# Altium PCB main_board.PcbDoc (part 2 of 2)
Units mm, origin at the board's own origin, x right, y up, seen from the top; angles counter-clockwise.
Board outline 50 x 49.98 mm, 2 copper layers (Top Layer, Bottom Layer), stack 1.071 mm thick; 96 components, 82 nets, 418 pads, 272 vias.
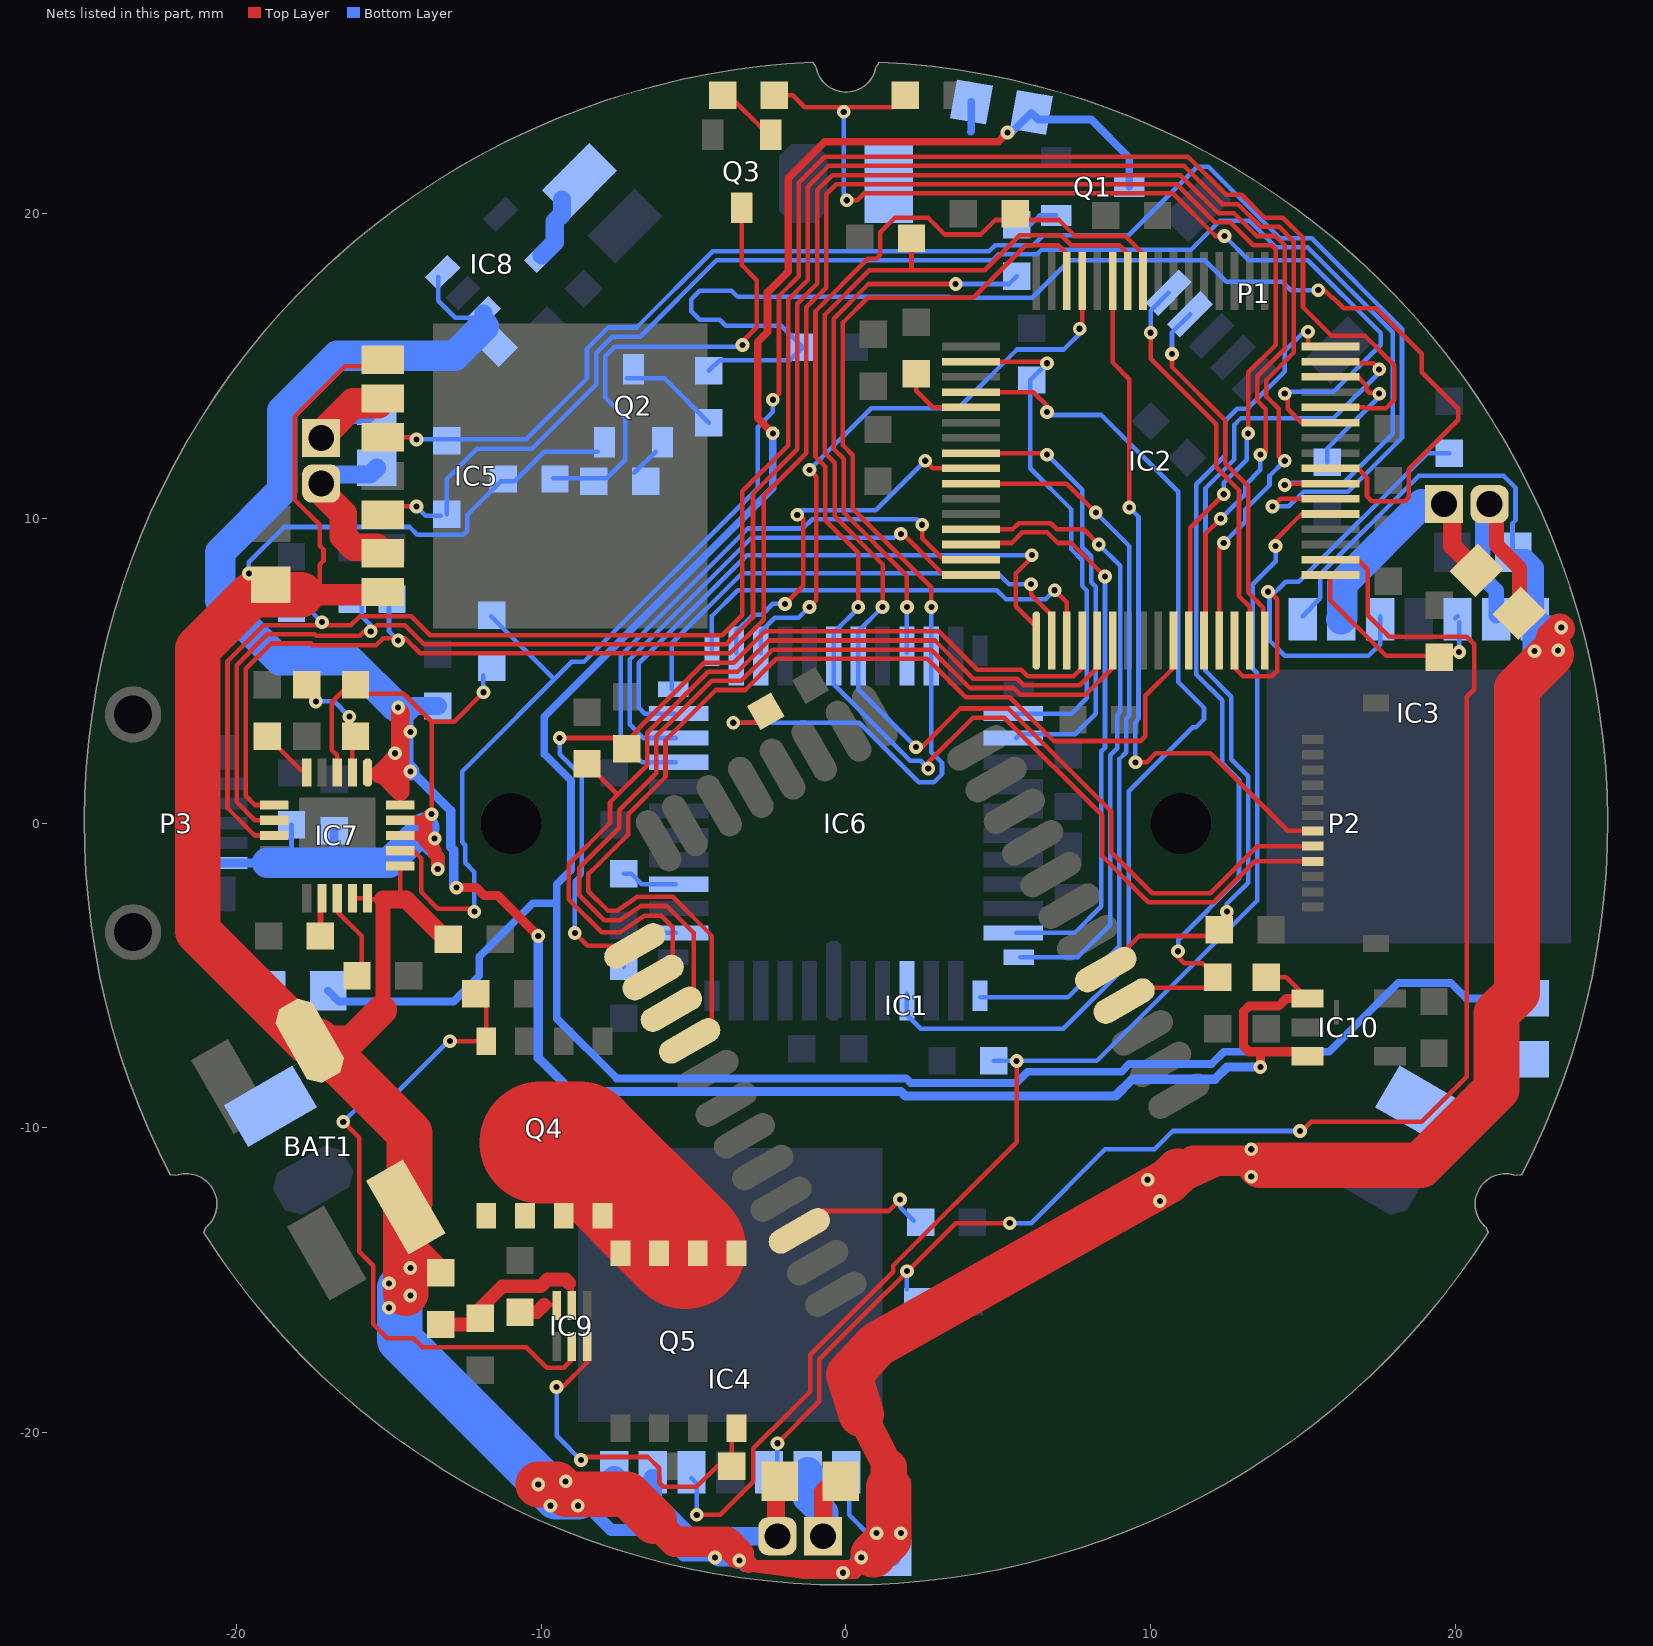
[diagram p2: the nets of this part, all layers, seen from the top]

## Via types
v1: diameter 0.45, hole 0.2, Top Layer to Bottom Layer, 271 vias
v2: diameter 0.45, hole 0.2, Top Layer to Bottom Layer, tented both sides, 1 vias

## Nets (pads, with @x,y where several pads share a name; then routed paths per layer and width w, separated by ;. In a path a pad name is that pad's centre, name@x,y a point inside that pad or via, vN(x,y) a via of type N, cw(c..) or ccw(c..) an arc to the next point about the centre after c; other vN are vias at no path point) (continued)
NetC12_2: C12.2 IC7.3 IC7.18 IC7.19 P3.1 R25.2 R26.2 R31.2 | length 27
  Top Layer w0.15: IC7.3@-16.7,1.665 -16.7,2.232 -16.875,2.407 -16.875,3.975 -16.2,4.65 -15.8,4.25 -14.514,4.25 -13.6,3.336 ; v1(-13.6,0.3) -13.6,3.336 ; v1(-11.9,4.3) -12.864,3.336 -13.6,3.336
  Top Layer w0.3: IC7.18@-14.635,-0.4 -14.1,-0.4 -14.05,-0.45 -13.8,-0.45 ; IC7.19@-14.635,0.1 -13.8,0.1
  Top Layer w0.45: v1(-13.6,0.3) -13.8,0.1 -13.8,-0.45 -13.8,-0.585 -13.495,-0.89 -13.495,-1.005 -13.4,-1.1 v1(-13.4,-1.5)
  Bottom Layer w0.15: -18.2,-1.3 R31.2@-18.2,-0.05 ; v1(-11.9,4.3) R25.2@-11.9,4.85
  Bottom Layer w0.3: P3.1@-20.55,-1.3 -18.9,-1.3 ; -16.8,-1.3 C12.2@-16.8,-0.25
  Bottom Layer w0.45: -13.85,-0.15 -13.85,-0.65 -13.4,-1.1 v1(-13.4,-1.5)
  Bottom Layer w1: -19,-1.3 -18.2,-1.3 -16.8,-1.3 -15,-1.3 -13.85,-0.15
  other v1: -13.5,-0.5
NetC14_2: C14.2 IC9.5 R35.1 | length 5.8
  Top Layer w0.15: -9.08,-15.1 -9,-15.18 IC9.5@-9,-15.825
  Top Layer w0.45: R35.1@-13.3,-16.45 -12.2,-16.45 C14.2@-12,-16.25 -12,-15.92 -11.28,-15.2 -10.02,-15.2 -9.795,-14.975 -9.205,-14.975 -9.08,-15.1
NetC18_1: C18.1 IC3.6 M1.2 | length 7.6
  Top Layer w0.5: M1.2@20.85,10.5 21.35,10 21.35,9.135 22.107,8.378 C18.1@22.107,6.893
  Bottom Layer w0.5: M1.2@20.9,10.05 20.9,8.084 21.34,7.644 IC3.6@21.34,6.8
NetC18_2: C18.2 IC3.2 M1.1 | length 8.5
  Top Layer w0.6: M1.1@19.35,10.5 19.7,10.5 19.9,10.3 19.9,9.1 C18.2@20.693,8.307
  Bottom Layer w1: IC3.2@16.26,6.7 16.295,6.735 16.295,7.87 18.9,10.475 M1.1@19.625,10.475
NetC19_1: C19.1 IC4.6 M2.2 | length 7.2
  Top Layer w0.6: C19.1@-2.3,-21.5 -2.3,-23.35 M2.2@-2.25,-23.4
  Bottom Layer w0.6: IC4.6@-6.34,-21.5 -6.34,-22.231 -5.171,-23.4 M2.2@-2.25,-23.4
NetC19_2: C19.2 IC4.2 M2.1 | length 4.5
  Top Layer w0.6: M2.1@-0.75,-23.4 -0.75,-21.95 C19.2@-0.3,-21.5
  Bottom Layer w0.6: IC4.2@-1.26,-21.5 IC4.2@-1.175,-21.585
  Bottom Layer w1: IC4.2@-1.26,-21.3 -1.26,-21.5 -1.26,-22.114 -0.75,-22.624 M2.1@-0.75,-23.4
NetC20_1: C20.1 IC5.6 M3.2 | length 5.6
  Top Layer w0.6: M3.2@-17.4,11.45 M3.2@-17,11.05
  Top Layer w0.9: M3.2@-17.225,10.885 -16.5,10.16 -16.5,9.416 -16.149,9.065 -15.405,9.065 IC5.6@-15.2,8.86
  Bottom Layer w0.6: M3.2@-17,11.45 -15.62,11.45 C20.1@-15.4,11.67
NetC20_2: C20.2 IC5.2 M3.1 | length 4.9
  Top Layer w0.5: M3.1@-17.225,12.65 -17.225,12.729 M3.1@-17.225,13.025
  Top Layer w1: M3.1@-17.225,12.729 -16.169,13.785 IC5.2@-15.355,13.785
  Bottom Layer w0.5: M3.1@-17.3,12.95 -16.9,13.35 -15.72,13.35 C20.2@-15.4,13.67
NetIC1_4: IC1.4 IC2.32 R4.1 | length 28.9
  Top Layer w0.15: IC1.4@9.127,-5.839 9.661,-5.839 10.1,-5.4 11.9,-5.4 11.9,-4.8 11.7,-4.6 11.1,-4.6 10.9,-4.4 v1(10.9,-4.2) ; IC2.32@15.175,15.725 v1@15.175,16.164
  Bottom Layer w0.15: v1(10.9,-4.2) 10.9,-3.824 12.9,-1.824 12.9,1.424 12.35,1.974 12.35,4.035 11.5,4.885 11.5,11.124 12.45,12.074 12.45,13.111 12.45,13.211 12.84,13.601 13.172,13.601 14.399,14.828 14.399,15.499 v1@15.1,16.2
  other v1: 15.163,16.136
NetIC1_5: IC1.5 IC2.31 R3.1 | length 29.5
  Top Layer w0.15: IC1.5@8.527,-4.799 9.626,-3.7 12.1,-3.7 12.5,-3.3 v1(12.5,-2.9) ; IC2.31@15.9,15.15 15.95,15.1 17.3,15.1 v1(17.5,14.9)
  Bottom Layer w0.15: v1(12.5,-2.9) 12.5,-2.649 13.2,-1.949 13.2,1.549 12.65,2.099 12.65,4.159 11.8,5.009 11.8,11 12.75,11.95 12.75,12.986 12.75,13.086 12.964,13.301 16.007,13.301 17.5,14.793 v1(17.5,14.9)
NetIC1_13: IC1.13 IC2.4 R2.1 | length 29.3
  Top Layer w0.15: v1@-9.4,2.683 v1(-9.4,2.8) -7.1,2.8 -6.825,3.075 -6.825,3.099 -4.649,5.275 -3.684,5.275 -2.659,6.3 3.045,6.3 4.304,5.04 5.749,5.04 5.964,4.825 7.468,4.825 7.75,5.107 IC2.4@7.75,6 ; v1(-8.9,-3.6) -8.475,-4.025 IC1.13@-6.932,-4.025
  Bottom Layer w0.15: v1(-9.4,2.8) -9.4,2.27 -8.675,1.545 -8.675,-1.677 -8.9,-1.902 v1(-8.9,-3.6)
NetIC1_14: IC1.14 IC2.5 R1.1 | length 31.9
  Top Layer w0.15: R1.1@-8.5,1.95 -7.491,0.941 ; IC1.14@-6.332,-5.064 -5.682,-4.415 -5.682,-3.408 -6.059,-3.032 -6.61,-3.032 -7.408,-3.578 -8.022,-3.578 -9.1,-2.5 -9.1,-1.345 -7.746,0.009 -7.746,0.686 -6.525,1.907 -6.525,2.975 -4.525,4.975 -3.56,4.975 -2.535,6 2.92,6 4.18,4.74 5.625,4.74 5.84,4.525 7.668,4.525 8.25,5.107 IC2.5@8.25,6
NetIC1_15: IC1.15 IC2.6 | length 31.9
  Top Layer w0.15: IC1.15@-5.732,-6.103 -5.403,-6.103 -5,-5.7 -5,-3.6 -5.886,-2.714 -6.735,-2.714 -7.415,-3.178 -7.935,-3.178 -8.757,-2.357 -8.757,-1.457 -7.446,-0.146 -7.446,0.424 -6.225,1.645 -6.225,2.851 -4.401,4.675 -3.435,4.675 -2.41,5.7 2.796,5.7 4.056,4.44 5.5,4.44 5.716,4.225 7.868,4.225 8.75,5.107 IC2.6@8.75,6
NetIC1_16: IC1.16 IC2.10 | length 36.3
  Top Layer w0.15: IC1.16@-5.132,-7.143 -4.4,-6.411 -4.4,-3.7 -5.686,-2.414 -6.859,-2.414 -7.5,-2.864 -7.825,-2.864 -8.457,-2.232 -8.457,-1.657 -8.238,-1.462 -7.146,-0.37 -7.146,0.299 -5.925,1.521 -5.925,2.726 -4.276,4.375 -3.311,4.375 -2.286,5.4 2.672,5.4 3.932,4.14 5.376,4.14 6.816,2.7 9.668,2.7 9.825,2.857 9.825,4.182 10.75,5.107 IC2.10@10.75,6
NetIC1_22: IC1.22 R5.2 | length 5.4
  Top Layer w0.15: IC1.22@-2.181,-13.781 -1.778,-13.378 IC1.22@-1.532,-13.378 -0.879,-12.725 1.4,-12.725 v1(1.775,-12.35)
  Bottom Layer w0.15: v1(1.775,-12.35) 1.775,-12.6 R5.2@2.225,-13.05
NetIC2_11: IC2.11 IC7.6 R30.1 | length 69
  Top Layer w0.15: IC7.6@-18.765,0.6 -19.4,0.6 -19.7,0.9 -19.7,5.068 -18.868,5.9 -17.561,5.9 -17.511,5.85 -15.414,5.85 -15.187,6.076 -14.476,6.076 -13.975,5.575 -3.808,5.575 -2.7,6.683 -2.7,10.751 -1.3,12.151 -1.3,16.933 -0.65,17.583 -0.65,20.65 -0.325,20.975 10.852,20.975 12.102,19.725 12.611,19.725 13.361,18.975 13.968,18.975 14.1,18.843 14.1,15.7 13.2,14.8 13.2,13.5 v1@13.2,12.9 ; IC2.11@11.3,6.25 11.3,9.7 v1(12.4,10.8) ; v1(13.2,12.8) v1@13.2,12.9
  Bottom Layer w0.15: R30.1@-15,7.35 -15,6.3 v1(-14.7,6) ; v1(12.4,10.8) 12.4,11.176 13.15,11.926 v1@13.15,12.586 ; v1(13.2,12.8) v1@13.2,12.9
NetIC2_12: IC2.12 IC7.7 R29.1 | length 70.6
  Top Layer w0.15: IC7.7@-18.765,0.1 -19.4,0.1 -20,0.7 -20,5.192 -18.992,6.2 -17.436,6.2 -17.386,6.15 -15.964,6.15 -15.814,6.3 v1(-15.6,6.3) -15.4,6.5 -14.476,6.5 -13.851,5.875 -3.933,5.875 -3.054,6.754 -3.054,10.822 -1.6,12.276 -1.6,17.058 -0.95,17.708 -0.95,20.774 -0.449,21.275 10.976,21.275 12.226,20.025 12.736,20.025 13.486,19.275 14.092,19.275 14.4,18.967 14.4,15.576 13.5,14.676 13.5,13.876 13.782,13.594 13.782,12.182 v1@13.518,12.182 ; IC2.12@11.8,6.25 11.8,9.5 v1(12.3,10)
  Bottom Layer w0.15: R29.1@-15.9,7.35 -15.9,6.8 v1@-15.6,6.5 ; v1(12.3,10) 13.1,10.8 13.1,11.1 13.6,11.6 v1(13.6,12.1)
NetIC2_13: IC2.13 IC7.8 R28.1 | length 73
  Top Layer w0.15: IC7.8@-18.765,-0.4 -19.4,-0.4 -20.3,0.5 -20.3,5.317 -19.117,6.5 -16.25,6.5 -15.95,6.8 -14.268,6.8 -13.643,6.175 -4.057,6.175 -3.407,6.825 -3.407,10.893 -1.9,12.4 -1.9,17.182 -1.25,17.832 -1.25,20.899 -0.574,21.575 11.101,21.575 12.351,20.325 12.86,20.325 13.61,19.575 14.217,19.575 14.7,19.092 14.7,15.451 13.8,14.551 13.8,14 14.2,13.6 14.2,12.05 v1@14.45,11.8 ; IC2.13@12.25,6 12.25,9.05 v1(12.4,9.2)
  Bottom Layer w0.15: R28.1@-18.2,7.05 -17.65,7.05 v1(-17.2,6.6) ; v1@12.3,9.1 v1(12.4,9.2) 13.1,9.9 13.1,10.3 13.9,11.1 13.9,11.4 v1(14.4,11.9)
NetIC2_14: IC2.14 IC3.3 R12.2 | length 19.4
  Top Layer w0.15: IC2.14@12.75,6 12.75,5.107 13.032,4.825 13.968,4.825 14.15,5.007 14.15,7.35 13.9,7.6 v1(13.851,7.6)
  Bottom Layer w0.15: IC3.3@17.53,6.8 17.53,5.88 17.15,5.5 14.4,5.5 13.9,6 13.9,7.393 14.432,7.925 14.861,7.925 19.086,12.15 R12.2@19.8,12.15
NetIC2_17: IC2.17 IC3.5 R11.2 | length 6.7
  Top Layer w0.15: IC2.17@15.9,8.15 15.9,7.325 17.725,5.5 R11.2@19.425,5.5 ; R11.2@19.65,5.625 v1(20.125,5.625)
  Bottom Layer w0.15: IC3.5@20,6.73 IC3.5@20.07,6.8 ; v1(20.125,5.625) IC3.5@20.125,6.605
NetIC2_18: IC2.18 IC4.3 R14.2 | length 51.4
  Top Layer w0.15: v1(-2.25,-20.35) -0.875,-18.975 -0.875,-18.21 -0.875,-17.596 3.596,-13.125 v1(5.375,-13.125) ; v1(14.9,-10.1) 14.975,-10.1 15.275,-9.8 18.9,-9.8 20.375,-8.325 20.375,4.154 20.625,4.404 20.625,5.875 20.375,6.125 17.825,6.125 17.125,6.825 17.125,8.318 16.793,8.65 IC2.18@15.9,8.65
  Bottom Layer w0.15: IC4.3@-2.53,-21.5 -2.25,-21.22 v1@-2.25,-20.3 ; R14.2@2,-15.3 v1(2,-14.7) ; v1@5.375,-13.1 v1(5.375,-13.125) 6.075,-13.125 8.5,-10.7 10.126,-10.7 10.726,-10.1 v1(14.9,-10.1)
NetIC2_21: IC2.21 IC4.5 R13.2 | length 45.8
  Top Layer w0.15: v1(-4.9,-22.7) -4.132,-22.7 -3.045,-21.613 -3.045,-20.509 -2.436,-19.9 -2.425,-19.9 -1.175,-18.65 -1.175,-17.45 1.55,-14.725 1.55,-14.514 5.6,-10.464 v1(5.6,-7.8) ; v1@14.1,9.3 14.95,10.15 IC2.21@15.9,10.15
  Bottom Layer w0.15: IC4.5@-5.07,-21.5 -4.9,-21.67 v1(-4.9,-22.7) ; R13.2@4.85,-7.8 8.236,-7.8 13.5,-2.536 13.5,4.926 13.35,5.076 13.35,7.85 14.1,8.6 v1@14.1,8.9
  other v1: 14.1,9.1
NetIC2_22: IC2.22 IC5.3 R16.2 | length 50.8
  Top Layer w0.15: IC5.3@-15.4,12.67 v1@-14.17,12.67 ; v1(14,10.4) 14.25,10.65 IC2.22@15.9,10.65
  Bottom Layer w0.15: v1(-14.1,12.6) -10.5,12.6 -8.5,14.6 -8.5,15.574 -7.8,16.274 -6.877,16.274 -4.376,18.775 -3.983,18.775 -0.907,18.775 ; -0.907,18.775 4.693,18.775 4.893,18.975 6.143,18.975 6.468,19.3 9.283,19.3 11.529,21.546 11.899,21.546 14.245,19.2 15.285,19.2 18.25,16.235 18.25,12.658 16.467,10.875 15.011,10.875 14.536,10.4 v1(14,10.4)
NetIC2_23: IC2.23 IC5.5 R15.2 | length 49.3
  Top Layer w0.15: IC5.5@-15.4,10.13 -15.13,10.4 v1(-14.1,10.4) ; v1(14.4,11.1) 14.45,11.15 IC2.23@15.9,11.15
  Bottom Layer w0.15: v1(-14.1,10.4) -13.8,10.1 R15.2@-13.3,10.1 ; R15.2@-13.1,10.15 -13.1,11.3 -12.1,12.3 -10.3,12.3 -8.2,14.4 -8.2,15.449 -7.676,15.974 -7.426,15.974 -6.753,15.974 -4.251,18.475 4.817,18.475 5.017,18.675 6.267,18.675 6.417,18.825 11.325,18.825 12.275,19.775 13.245,19.775 14.12,18.9 15.161,18.9 17.95,16.111 17.95,12.782 16.343,11.175 14.475,11.175 v1(14.4,11.1)
NetIC2_24: IC2.24 R39.1 R43.2 | length 43.1
  Top Layer w0.15: v1@15.6,17.6 15.95,17.25 15.986,17.25 16.25,16.986 16.336,16.9 17.409,16.9 18.9,15.409 18.9,14.8 20.1,13.6 20.1,13.25 18.475,11.625 18.475,10.707 18.343,10.575 17.257,10.575 17.1,10.732 17.1,11.343 16.793,11.65 IC2.24@15.9,11.65
  Bottom Layer w0.15: R39.1@-4.5,14.85 -4.15,15.2 -1.85,15.2 R43.2@-1.425,15.625 -2.125,16.325 -3.95,16.325 -4.15,16.525 -4.797,16.525 -5.075,16.803 -5.075,17.197 -4.797,17.475 -3.756,17.475 -3.556,17.275 3.389,17.275 3.414,17.25 6.118,17.25 7.343,18.475 11.775,18.475 12.475,17.775 14.325,17.775 14.6,17.5 v1(15.5,17.5)
NetIC2_27: IC2.27 R40.2 R44.2 | length 33.4
  Top Layer w0.15: R40.2@-2.35,23.9 -1.75,23.9 -1.35,23.5 1.55,23.5 R44.2@1.95,23.9 ; v1(0.025,20.45) 0.374,20.45 0.599,20.675 10.728,20.675 12.128,19.275 v1(12.425,19.275) ; v1(14.4,14.1) 14.5,14 14.5,13.6 14.95,13.15 IC2.27@15.9,13.15
  Bottom Layer w0.15: v1(-0.075,23.35) -0.075,20.55 v1(0.025,20.45) ; v1(12.425,19.275) 13.225,18.475 15.161,18.475 17.546,16.09 17.546,15.712 16,14.166 14.466,14.166 v1(14.4,14.1)
NetIC2_28: IC2.28 IC7.17 R25.1 | length 63.1
  Top Layer w0.15: IC7.17@-14.635,-0.9 -14.202,-0.9 -13.945,-1.157 -13.945,-2.255 -13.4,-2.8 v1@-12.3,-2.8 ; v1(-2.4,13.9) -2.2,14.1 -2.2,17.306 -1.55,17.956 -1.55,21.023 -0.698,21.875 11.225,21.875 12.475,20.625 12.984,20.625 13.734,19.875 14.341,19.875 15,19.216 15,16.936 15.936,16 17.036,16 18,15.036 18,14.564 18,13.9 17.725,13.625 17.039,13.625 17.014,13.65 IC2.28@15.9,13.65
  Bottom Layer w0.15: v1@-12.2,-3 -12.2,-1.6 -12.5,-1.3 -12.5,-1.127 -12.5,-0.727 -12.6,-0.627 -12.6,1.7 -9,5.3 -8.6,5.3 -2.9,11 -2.9,13 -2.4,13.5 v1(-2.4,13.9) ; R25.1@-11.65,6.8 -9.575,4.725
  other v1: -12.2,-2.9
NetIC2_30: IC2.30 R10.1 | length 5
  Top Layer w0.15: IC2.30@15.9,14.65 16.793,14.65 17.075,14.368 17.075,14.225 17.175,14.125 17.575,14.125 17.55,14.1 v1(17.5,14.1)
  Bottom Layer w0.15: R10.1@15.8,11.85 15.8,12.3 17.5,14 v1(17.5,14.1)
NetIC2_45: IC2.45 IC6.21 | length 19.8
  Top Layer w0.15: v1(-1.2,7.1) -0.975,7.325 -0.975,11.375 v1(-1.2,11.6) ; v1(7.668,16.232) 7.75,16.315 IC2.45@7.75,17.8
  Bottom Layer w0.15: IC6.21@-2.8,5.59 -2.8,6.283 -2.343,6.74 -1.56,6.74 v1(-1.2,7.1) ; v1(-1.2,11.6) 0.825,13.625 3.689,13.625 5.614,15.55 7.15,15.55 v1@7.75,16.15
NetIC2_46: IC2.46 IC6.28 R24.2 | length 34.6
  Top Layer w0.15: v1(-3.7,3.3) -3.011,3.3 R24.2@-2.636,3.675 ; v1(2.8,7.1) 2.8,7.749 0.225,10.324 0.225,12.084 -0.1,12.409 -0.1,16.436 0.714,17.25 4.175,17.25 5.9,18.975 6.968,18.975 7.25,18.693 IC2.46@7.25,17.8
  Bottom Layer w0.15: v1(-3.7,3.3) 0.439,3.3 2.389,1.35 2.886,1.35 3.15,1.614 3.15,1.986 2.8,2.336 2.8,5.59 v1(2.8,7.1)
NetIC2_50: IC2.50 IC6.32 R19.1 | length 17
  Top Layer w0.15: IC2.50@4.1,15.15 6.55,15.15 v1(6.6,15.1)
  Bottom Layer w0.15: IC6.32@5.59,3.6 7.4,3.6 7.9,4.1 7.9,7.639 7.75,7.789 7.75,8.638 7.4,8.988 7.4,10.3 6.05,11.65 6.05,14.55 v1(6.6,15.1)
NetIC2_53: IC2.53 R9.2 | length 2.6
  Top Layer w0.15: R9.2@2.3,14.75 2.3,14.2 2.85,13.65 IC2.53@4.1,13.65
NetIC2_56: IC2.56 IC6.33 | length 14.6
  Top Layer w0.15: IC2.56@4.1,12.15 6.55,12.15 v1(6.6,12.1)
  Bottom Layer w0.15: IC6.33@5.59,2.8 5.715,2.925 7.525,2.925 8.2,3.6 8.2,7.764 8.05,7.914 8.05,8.762 7.75,9.062 7.75,10.95 v1(6.6,12.1)
NetIC2_57: IC2.57 IC6.20 | length 12.5
  Top Layer w0.15: v1(-2,7.2) -1.4,7.8 -1.4,10 v1@-1.6,10.2 ; v1(2.6,11.9) 2.85,11.65 IC2.57@4.1,11.65
  Bottom Layer w0.15: IC6.20@-3.6,5.59 -3.6,6.3 -3.063,6.837 -2.775,6.837 ; -2.75,6.85 -2.4,7.2 v1(-2,7.2) ; v1@-1.6,10.2 -1.525,10.275 0.975,10.275 v1(2.6,11.9)
  other v1: -1.6,10.125
NetIC6_8: IC6.8 R17.1 | length 2.2
  Bottom Layer w0.15: R17.1@-7.3,-4.7 -7.3,-4.617 -6.283,-3.6 IC6.8@-5.59,-3.6
NetIC6_10: IC6.10 R18.1 | length 1.9
  Bottom Layer w0.15: R18.1@-7.3,-1.65 -7.05,-1.65 -6.7,-2 IC6.10@-5.59,-2
NetIC6_27: IC6.27 R23.1 | length 18.5
  Top Layer w0.15: v1(2,7.1) 2,8.124 -0.075,10.199 -0.075,11.96 -0.4,12.285 -0.4,16.561 0.739,17.7 v1(3.6,17.7)
  Bottom Layer w0.15: IC6.27@2,5.59 v1(2,7.1) ; v1(3.6,17.7) 5.35,17.7 R23.1@5.6,17.95
NetIC7_2: IC7.2 R26.1 R27.2 | length 2.6
  Top Layer w0.15: R26.1@-16.2,2.95 IC7.2@-16.2,1.665 IC7.2@-16.175,1.69
  Bottom Layer w0.15: v1(-17.4,4) -16.8,4 v1(-16.3,3.5)
NetIC7_5: IC7.5 R34.2 | length 1.8
  Top Layer w0.15: R34.2@-19,2.85 -17.9,1.75 -17.785,1.75 IC7.5@-17.7,1.665
NetIC7_12: IC7.12 R33.2 | length 1.3
  Top Layer w0.2: R33.2@-17.25,-3.7 -17.25,-2.515 IC7.12@-17.2,-2.465
NetIC7_13: IC7.13 R32.2 | length 3
  Top Layer w0.15: IC7.13@-16.7,-2.465 -16.7,-2.898 -15.9,-3.698 -15.9,-4.65 R32.2@-16.25,-5
NetIC8_5: IC8.5 L1.1 | length 2.1
  Bottom Layer w0.6: IC8.5@-9.988,18.641 -9.564,19.066 -9.564,19.75 -9.325,19.989 L1.1@-9.325,20.475
NetIC9_2: IC9.2 Q4.G R41.2 | length 22.4
  Top Layer w0.15: v2(-16.5,-9.8) -15.982,-10.318 -15.982,-14.062 -15.518,-14.526 -15.518,-16.436 -15.054,-16.9 -14.2,-16.9 -13.9,-17.2 -10.5,-17.2 -9.825,-17.875 -9.267,-17.875 -9,-17.608 IC9.2@-9,-16.975 ; v1(-13,-7.15) Q4.G@-11.805,-7.15 -11.805,-5.945 R41.2@-12.15,-5.6
  Bottom Layer w0.15: v2(-16.5,-9.8) -16,-9.3 -15.2,-9.3 -13.05,-7.15 v1(-13,-7.15)
NetIC9_3: IC9.3 Q5.G R42.2 | length 13.1
  Top Layer w0.15: v1(-9.5,-18.5) -9.3,-18.5 -8.5,-17.7 IC9.3@-8.5,-16.8 ; v1(-8.7,-20.9) -8.6,-20.9 -8.6,-21 -8.8,-20.8 -6.5,-20.8 -6.125,-21.175 -6.125,-21.643 -5.993,-21.775 -4.907,-21.775 -4.232,-21.1 R42.2@-3.75,-21.1 -3.75,-20.005 Q5.G@-3.595,-19.85
  Bottom Layer w0.15: v1(-9.5,-18.5) -9.5,-20.1 -8.6,-21 -8.6,-20.9 v1(-8.7,-20.9)
NetIC9_6: IC9.6 R38.2 | length 1.6
  Top Layer w0.15: R38.2@-10.7,-16.05 R38.2@-10.525,-16.225 ; -9.9,-15.8 -9.525,-15.8 IC9.6@-9.5,-15.825
  Top Layer w0.45: R38.2@-10.7,-16.05 -10.15,-16.05 -9.9,-15.8
NetLED1_K: LED1.2 R20.2
NetLED2_K: LED2.2 R21.2
NetLED3_K: LED3.2 R22.2 | length 1
  Bottom Layer w0.25: 4.1,22.7 4.115,22.715 R22.2@4.115,23.674
NetQ1_D: Q1.3 R20.1 R21.1 R22.1 | length 89.2
  Top Layer w0.25: v1(-2.4,12.8) -2.9,13.3 -2.9,15.805 -2.575,16.13 -2.575,17.426 -1.9,18.101 -1.9,21.168 -0.693,22.375 5,22.375 v1(5.3,22.675)
  Bottom Layer w0.25: R20.1@-17,-5.5 -16.65,-5.85 -12.875,-5.85 -12.031,-5.006 -12.031,-4.381 -10.275,-2.625 -9.5,-2.625 ; v1(-2.4,12.8) -2.4,10.995 -9.9,3.495 -9.9,2.275 -9.025,1.4 -9.025,-1.532 -9.5,-2.007 -9.5,-2.625 ; v1(5.3,22.675) 5.433,22.675 R22.1@6.085,23.326 6.311,23.1 8.05,23.1 9.3,21.85 Q1.3@9.3,20.9 ; R21.1@22.425,-5.75 20.356,-5.75 19.848,-5.241 18.124,-5.241 15.866,-7.5 12.407,-7.5 12.006,-7.9 9.295,-7.9 9.045,-8.15 5.957,-8.15 5.582,-8.525 2.127,-8.525 1.977,-8.375 -7.532,-8.375 -9.5,-6.407 -9.5,-2.625
NetQ1_G: Q1.1 R23.2 | length 1.4
  Bottom Layer w0.15: R23.2@5.6,19.65 6.05,19.65 6.35,19.95 Q1.1@6.9,19.95
NetQ2_D: Q2.3 R39.2 | length 3.3
  Bottom Layer w0.15: Q2.3@-7.2,14.6 -5.95,14.6 R39.2@-4.5,13.15
NetQ2_G: Q2.1 R37.1 | length 1
  Bottom Layer w0.15: R37.1@-6.95,11.5 Q2.1@-6.25,12.2
NetQ3_D: Q3.3 R36.1 R37.2 | length 16
  Top Layer w0.15: Q3.3@-3.425,20.2 -3.425,18.325 -2.925,17.825 -2.925,16.275 -3.4,15.8 v1(-3.4,15.7)
  Bottom Layer w0.15: R36.1@-9.6,11.325 -7.857,11.325 -7.25,11.932 -7.25,13.325 -7.9,13.975 -7.9,15.325 -7.587,15.638 -3.562,15.638 -3.4,15.8 v1(-3.4,15.7)
NetQ3_G: Q3.1 R40.1 | length 2
  Top Layer w0.15: R40.1@-3.95,24 Q3.1@-2.512,22.562
NetQ4_D: Q4.D Q5.D | length 6.2
  Top Layer w4: -10.025,-10.475 -8.75,-10.475 -5.275,-13.95
PGEC: IC2.15 P1.5 | length 13
  Top Layer w0.15: v1(10,16.1) 10,15.251 12.15,13.101 12.15,11.686 12.9,10.936 12.9,7.451 13.25,7.101 IC2.15@13.25,6
  Bottom Layer w0.15: v1(10,16.1) 10,16.828 P1.5@10.586,17.414
PGED: IC2.16 P1.4 | length 12.2
  Top Layer w0.15: v1(10.7,15.4) 10.7,14.976 12.45,13.226 12.45,11.811 13.2,11.061 13.2,7.576 13.7,7.076 IC2.16@13.7,6
  Bottom Layer w0.15: v1(10.7,15.4) 10.7,16.114 P1.4@11.293,16.707
PIXEL_D0: IC2.58 IC6.43 | length 24.6
  Top Layer w0.15: IC2.58@4.1,11.15 7.25,11.15 v1(8.2,10.2)
  Bottom Layer w0.15: IC6.43@4.4,-5.715 7.285,-5.715 8.975,-4.025 8.975,2.111 9.2,2.336 9.2,3.424 9.25,3.474 9.25,3.499 9.3,3.549 9.3,9.1 v1(8.2,10.2)
PIXEL_D1: IC2.61 IC6.42 | length 20.9
  Top Layer w0.15: IC2.61@4.15,9.7 IC2.61@4.1,9.65 5.465,9.65 5.665,9.85 6.723,9.85 6.923,9.65 7.799,9.65 v1(8.3,9.149)
  Bottom Layer w0.15: IC6.42@5.715,-4.4 7.6,-4.4 8.675,-3.325 8.675,2.236 8.9,2.461 8.9,3.549 8.95,3.598 8.95,3.623 9,3.673 9,8.449 v1(8.3,9.149)
PIXEL_D2: IC2.62 IC6.41 | length 19.2
  Top Layer w0.15: IC2.62@4.1,9.15 4.993,9.15 5.043,9.2 5.439,9.2 5.789,9.55 6.599,9.55 6.949,9.2 7.4,9.2 v1(8.5,8.1)
  Bottom Layer w0.15: IC6.41@5.59,-3.6 7.5,-3.6 8.375,-2.725 8.375,2.36 8.5,2.485 v1(8.5,8.1)
PIXEL_D3: IC2.63 IC6.15 | length 19.1
  Top Layer w0.15: v1(2.5,9.8) 2.5,9.357 3.207,8.65 IC2.63@4.1,8.65
  Bottom Layer w0.15: IC6.15@-5.59,2 -6.697,2 -7.4,2.703 -7.4,5.5 -3.225,9.675 -1.414,9.675 -1.114,9.975 2.325,9.975 v1(2.5,9.8)
PIXEL_D4: IC2.64 IC6.16 | length 17.5
  Top Layer w0.15: v1(1.8,9.5) 1.7,9.5 1.857,9.5 3.207,8.15 IC2.64@4.1,8.15
  Bottom Layer w0.15: IC6.16@-5.59,2.8 -6.649,2.8 -7.1,3.251 -7.1,5.376 -3.101,9.375 1.575,9.375 1.7,9.5 v1(1.8,9.5)
PIXEL_D5: IC2.1 IC6.17 | length 20.4
  Top Layer w0.15: v1@6.137,8.762 5.575,8.2 5.575,7.125 6.25,6.45 IC2.1@6.25,6
  Bottom Layer w0.15: IC6.17@-5.59,3.6 -6.6,3.6 -6.8,3.8 -6.8,5.251 -3.251,8.8 v1(6.1,8.8)
PIXEL_D6: IC2.2 IC6.18 | length 16.5
  Top Layer w0.15: v1(6.075,7.85) 6.075,7.5 6.4,7.175 6.406,7.175 6.75,6.831 IC2.2@6.75,6
  Bottom Layer w0.15: IC6.18@-5.715,4.4 -5.715,5.912 -3.427,8.2 5,8.2 5.35,7.85 v1(6.075,7.85)
PIXEL_D7: IC2.3 IC6.19 | length 15.1
  Top Layer w0.15: v1@6.85,7.5 v1(6.85,7.65) 7.25,7.25 IC2.3@7.25,6
  Bottom Layer w0.15: IC6.19@-4.4,5.715 -4.4,6.803 -3.553,7.65 4.95,7.65 5.25,7.35 6.55,7.35 v1(6.85,7.65) v1@6.85,7.5
PIXEL_WR: IC2.52 IC6.46 | length 34.1
  Top Layer w0.15: IC2.52@4.1,14.15 6.15,14.15 6.6,13.7 v1(6.6,13.5)
  Bottom Layer w0.15: IC6.46@2,-5.59 2,-6.283 2.457,-6.74 7.136,-6.74 9.275,-4.601 9.275,1.05 11.375,3.15 11.486,3.15 11.75,3.414 11.75,3.786 10.9,4.636 10.9,10.876 8.376,13.4 v1@6.7,13.4
SCL: IC2.42 IC6.25 P2.5 R6.1 | length 46.7
  Top Layer w0.15: v1(1.2,7.1) 1.2,8.5 -0.375,10.075 -0.375,11.836 -0.7,12.161 -0.7,16.685 0.765,18.15 4.55,18.15 5.7,19.3 7.067,19.3 7.392,18.975 8.968,18.975 9.25,18.693 IC2.42@9.25,17.8 ; 2.15,18.2 R6.1@2.15,19.2 ; v1(2.3,2.5) 2.484,2.5 3.753,3.768 5.324,3.768 8.705,0.387 8.705,-0.95 10.05,-2.295 11.95,-2.295 13.495,-0.75 P2.5@15.275,-0.75
  Bottom Layer w0.15: v1(1.2,7.1) 0.4,6.3 0.4,4.4 v1(2.3,2.5)
SDA: IC2.41 IC6.24 P2.4 R7.1 | length 48.9
  Top Layer w0.15: v1(0.4,7.1) 0.4,8.876 -0.675,9.951 -0.675,11.711 -1,12.036 -1,16.809 0.716,18.525 0.993,18.525 1.125,18.657 1.125,19.393 1.607,19.875 2.693,19.875 3.243,19.325 4.425,19.325 4.9,19.8 6.992,19.8 7.517,19.275 9.168,19.275 9.75,18.693 IC2.41@9.75,17.8 ; v1(2.7,1.8) 2.7,1.998 4.17,3.468 5.199,3.468 8.405,0.262 8.405,-1.075 9.925,-2.595 12.075,-2.595 13.419,-1.25 P2.4@15.275,-1.25
  Bottom Layer w0.15: v1(0.4,7.1) 0.4,7.064 -0.4,6.264 -0.4,4.564 2.114,2.05 2.45,2.05 v1(2.7,1.8)
TOUCH_C\H\A\N\G\E\: IC2.43 P2.6 | length 23.1
  Top Layer w0.15: IC2.43@8.75,17.8 8.75,15.124 9.3,14.574 v1(9.3,10.364) ; v1(9.5,2) 9.865,2 10.16,2.295 11.957,2.295 14.501,-0.25 P2.6@15.275,-0.25
  Bottom Layer w0.15: v1(9.3,10.364) 9.6,10.064 9.6,3.424 9.55,3.374 9.55,3.35 9.5,3.3 v1(9.5,2)
VBATPROTECTED: BAT1.1 C7.2 C8.2 C9.2 C11.2 IC3.1 IC3.7 IC4.1 IC4.7 IC5.1 IC5.7 IC7.14 IC7.15 IC7.16 Q2.2 R35.2 R36.2 | length 176.1
  Top Layer w0.15: -17.275,7.5 -17.275,8.489 -17.15,8.614 -17.15,8.986 -17.275,9.111 -17.275,9.793 -18.1,10.618 -18.1,13.343 -16.443,15 -15.61,15 IC5.1@-15.4,15.21 ; IC7.14@-16.2,-2.465 IC7.15@-15.7,-2.465 -15.665,-2.5 -15.2,-2.5 ; -14.675,-2.5 -14.635,-2.46 IC7.16@-14.635,-1.4
  Top Layer w0.4: -3.2,-24.3 -3.125,-24.375 ; 0.175,-24.375 -3.125,-24.375 ; 0.9,-24 0.3,-24.6 v1(-0.1,-24.6) -1.4,-24.6 -3.125,-24.375
  Top Layer w0.5: -15.2,-5.9 -15.2,-2.5
  Top Layer w0.6: -15.2,-2.5 -14.675,-2.5 -14.442,-2.5 C11.2@-13.342,-3.6 ; BAT1.1@-14.2,-13.725 R35.2@-13.237,-14.688 ; -3.525,-23.975 -3.2,-24.3
  Top Layer w0.7: -17.275,7.5 IC5.7@-15.49,7.5
  Top Layer w1: BAT1.1@-17.601,-7.143 -16.243,-7.143 -15.235,-6.135 ; -6.3,-22.9 -5.625,-23.575 -3.925,-23.575 -3.525,-23.975 ; 0.5,-19.4 1.4,-21.139 ; 10.598,-11.725 10.756,-11.725 ; 13.822,-11.078 12.2,-11.078 ; 23.15,5.55 23.15,6.1 v1@23.432,6.382 ; 10.756,-11.725 11.403,-11.078 12.2,-11.078 ; 10.756,-11.725 12.2,-11.078
  Top Layer w1.2: 1.4,-21.8 1.4,-21.139
  Top Layer w1.5: -17.9,7.5 -19.5,7.5 -21.275,5.725 -21.275,-3.548 -17.68,-7.143 BAT1.1@-17.601,-7.143 -17.357,-7.143 -14.325,-10.175 BAT1.1@-14.325,-12.473 ; v1@-14.451,-15.428 BAT1.1@-14.451,-12.599 ; v1(-10.1,-21.7) -9.491,-21.7 -9.166,-22.025 -7.175,-22.025 -6.3,-22.9 ; 0.5,-19.4 0.1,-18.1 1.011,-17.111 10.078,-12.017 10.083,-12.014 10.598,-11.725 10.898,-11.425 ; 0.9,-24 1.4,-23.5 1.4,-21.8 ; 13.6,-11.225 18.854,-11.225 21.35,-8.729 21.35,-6.241 22.025,-5.566 22.025,4.425 23.15,5.55
  Bottom Layer w0.15: v1(-19.6,8.2) -19.6,8.568 -18.443,9.725 -14.325,9.725 -14.075,9.475 -12.557,9.475 -12.425,9.607 -12.425,10.125 -11.325,11.225 -10.875,11.225 -9.9,12.2 Q2.2@-8.15,12.2 ; IC4.1@0.01,-21.5 0.1,-21.59 0.1,-22.7 v1@0.85,-23.45 ; IC3.1@14.99,6.8 15.57,7.38 15.57,8.17 18.8,11.4 21.585,11.4 21.975,11.01 21.975,9.94 21.875,9.84 C8.2@21.875,8.7
  Bottom Layer w0.3: -6.295,-23.195 -6.229,-23.195 -5.339,-24.085 -4.315,-24.085 v1(-4.3,-24.1)
  Bottom Layer w0.4: -8.8,-22.1 -7.705,-23.195 -6.295,-23.195 ; v1(-0.1,-24.6) 0.3,-24.6 0.775,-24.125 0.775,-23.775 ; v1(1,-23.3) 1,-23.55 0.975,-23.575 0.775,-23.775 ; v1@-3.6,-24.1 v1(-3.5,-24.2) ; v1@-3.6,-24.1 v1(-4.3,-24.1) -4.2,-24.2 v1(-3.5,-24.2) ; v1@-3.6,-24.1 -3.375,-24.1 -3.1,-24.375 ; v1(-3.5,-24.2) -3.325,-24.375 -3.1,-24.375 ; -3.1,-24.375 0.175,-24.375 0.775,-23.775
  Bottom Layer w0.6: v1@0.85,-23.45 0.975,-23.575 C7.2@1.5,-24.1 ; C8.2@21.875,8.7 22.3,8.7 22.61,8.39 IC3.7@22.61,6.8
  Bottom Layer w0.8: -8.8,-22.1 -8.21,-22.1 IC4.7@-7.61,-21.5 ; v1(22.6,5.65) IC3.7@22.6,6.69 ; IC3.7@22.61,6.7 IC3.7@22.885,6.425 ; v1(23.375,5.675) 23.375,5.935 IC3.7@22.885,6.425 ; v1(23.475,6.425) IC3.7@22.885,6.425
  Bottom Layer w1.5: -14.651,-15.249 -14.651,-16.949 -9.5,-22.1 -8.8,-22.1
  other v1: 0.5,-24.1 1.8,-23.3 -9.7,-22.4 -8.8,-22.4 -9.2,-21.6 -15,-15.9 -14.3,-15.5 -15,-15.1 -14.3,-14.6 10.3,-12.4 9.9,-11.7 13.3,-11.6 13.3,-10.7
VOUT: C10.2 C13.2 C17.2 IC7.1 IC7.20 IC8.1 IC8.3 IC10.1 IC10.3 | length 78.5
  Top Layer w0.15: IC7.1@-15.635,1.6 -15.3,1.6 ; IC7.20@-14.635,0.6 -14.635,1.035 ; C17.2@13.8,-5.05 14.45,-5.05 IC10.1@15.15,-5.75 IC10.1@14.925,-5.975 ; IC10.3@15.1,-7.7 IC10.3@15.15,-7.65
  Top Layer w0.3: v1(-12.788,-2.113) -12.125,-2.113 -11.868,-2.37 -11.43,-2.37 v1(-10.1,-3.7) ; v1(13.6,-8) 13.6,-7.5 ; IC10.3@15.1,-7.7 14.9,-7.5 13.6,-7.5 ; IC10.1@15.15,-5.75 14.45,-5.75 14.2,-6 13.226,-6 13.05,-6.176 13.05,-7.324 13.226,-7.5 13.6,-7.5
  Top Layer w0.6: -14.603,3.597 -14.635,3.629 v1@-14.635,2.3 ; v1@-14.635,2.3 -14.635,1.035 -15.2,1.6 -15.3,1.6 -15.3,1.635 v1@-14.635,2.3
  Bottom Layer w0.15: IC8.3@-13.377,17.939 -13.377,17.152 -12.821,16.596 -12.034,16.596 IC8.1@-11.897,16.732
  Bottom Layer w0.3: v1(-14.3,1.7) -14.258,1.7 -12.975,0.417 -12.975,-0.783 -12.875,-0.883 -12.875,-1.283 -12.875,-2.025 v1(-12.788,-2.113) ; v1(-10.1,-3.7) -10.1,-7.7 -9,-8.8 1.801,-8.8 1.951,-8.95 8.846,-8.95 9.396,-8.4 12.108,-8.4 12.508,-8 v1(13.6,-8)
  Bottom Layer w0.6: v1(-14.7,3.8) -14.5,3.6 -14.5,3.5 ; v1(-14.3,1.7) -14.5,1.9 -14.5,3.5 ; C10.2@-13.4,3.85 -14.15,3.85 -14.5,3.5 ; -11.897,16.297 IC8.1@-11.897,16.732
  Bottom Layer w1: v1(-14.7,3.8) -14.737,3.8 -16.287,5.35 -18.587,5.35 -20.542,7.305 -20.542,8.895 -18.5,10.937 -18.5,13.544 -16.694,15.35 -12.844,15.35 -11.897,16.297
  other v1: -14.8,2.3 -14.3,3
pads on no net: IC1.2 IC1.6 IC1.7 IC1.8 IC1.9 IC1.10 IC1.17 IC1.18 IC1.19 IC1.21 IC1.23 IC1.24 IC1.30 IC1.31 IC1.32 IC1.33 IC1.34 IC1.35 IC2.29 IC2.33 IC2.36 IC2.37 IC2.38 IC6.2 IC6.3 IC6.4 IC6.5 IC6.22 IC6.26 IC6.36 IC6.37 IC6.44 IC6.45 IC9.1 IC10.4 LensHolder1.0 LensHolder1.1 P1.Mechanical1 P1.Mechanical2 P2.3 P2.7 P3.2 P3.3 P3.4 P3.Shield1 P3.Shield2

## Polygon pours and split planes (outlines as drawn)
VBATPROTECTED on Top Layer "Top VBATPROTECTED 1" (solid, remove dead copper, pour order 13): -11.3,-25 -11.3,-21.3 -4.9,-14.9 2,-14.9 9.5,-10.5 9.5,-6.3 23.3,7.5 26.4,7.5 22.9,4 22.9,-11.1 21.9,-12.1 13,-12.1 1.4,-18.8 1.4,-19.1 4.1,-21.8 4.1,-25
VBATPROTECTED on Top Layer "Top VBATPROTECTED 2" (solid, remove dead copper, pour order 14): -18,-5.1 -17.6,-5.1 -16.6,-4.1 -16.6,-1.6 -15.6,-0.6 -14.7,-0.6 -12.3,-3 -12.3,-4.3 -14,-6 -14,-9.2 -13.5,-9.7 -13.5,-12.9 -12.8,-13.6 -12.8,-16 -13.8,-17 -15.2,-17 -16.5,-15.7 -16.5,-9.7 -22.6,-3.6 -22.6,6.7 -20.6,8.7 -14.1,8.7 -14.1,6.6 -14.8,5.9 -19.1,5.9 -19.9,5.1 -19.9,-3.2
GND on Top Layer "Top gnd plane" (solid, remove dead copper, pour order 24): -21.085,-13.432 -21.008,-13.266 ccw(c-21.651,-12.5) -21.993,-11.56 -22.175,-11.544 cw(c0,0) -1.09,24.976 -0.985,24.826 ccw(c0,25) 0.985,24.826 1.09,24.976 cw(c0,0) 22.175,-11.544 21.993,-11.56 ccw(c21.651,-12.5) 21.008,-13.266 21.085,-13.432 cw(c0,0)
NetBAT1_- on Top Layer "Bat -" (solid, remove dead copper, pour order 16): -15.5,-20.9 -21.6,-14.8 -21.6,-7.7 -20.5,-6.6 -20.3,-6.6 -10.5,-16.4 -8.9,-16.4 -8.5,-16 -8.5,-15.6 -8.3,-15.4 -7.6,-15.4 -4.1,-18.9 -4.1,-21.3 -4.7,-21.9 -7.7,-21.9 -8.7,-20.9
VOUT on Top Layer "Top VOUT" (solid, remove dead copper, pour order 17): -14.613,0.412 -15.775,1.575 -15.775,3.25 -14.675,4.35 -13.65,4.35 -13.65,1.375
3V3 on Top Layer "Top 3V3" (solid, remove dead copper, pour order 18): -14.8,17 -14.8,17.2 -14.625,17.375 -4.45,17.375 -4.25,17.175 -4.25,16.65 -4.6,16.3 -14.1,16.3
GND on Bottom Layer "Bottom gnd plane" (solid, remove dead copper, pour order 21): -21.085,-13.432 -21.008,-13.266 ccw(c-21.651,-12.5) -21.993,-11.56 -22.175,-11.544 cw(c0,0) -1.09,24.976 -0.985,24.826 ccw(c0,25) 0.985,24.826 1.09,24.976 cw(c0,0) 22.175,-11.544 21.993,-11.56 ccw(c21.651,-12.5) 21.008,-13.266 21.085,-13.432 cw(c0,0)
VOUT on Bottom Layer "Bottom VOUT" (solid, remove dead copper, pour order 15): -14.85,1.175 -15.15,1.475 -15.15,4.3 -14.45,4.3 -14.125,3.975 -14.125,3.6 -13.75,3.225 -13.75,1.175
VBATPROTECTED on Bottom Layer "Bottom VBATPROTECTED 1" (solid, remove dead copper, pour order 12): -17.7,-18.2 -17.7,-17 -15,-14.3 -13.9,-14.3 -13.4,-14.8 -13.4,-16.2 -8.4,-21.2 -6.4,-21.2 -6.4,-22.2 -5.3,-23.3 0.1,-23.3 0.1,-23 2.4,-23 2.4,-25 -10.9,-25
3V3 on Bottom Layer "Bottom 3V3" (solid, remove dead copper, pour order 19): -23,-11.7 -23,4.4 -22.3,5.1 -21.8,5.1 -21.1,4.4 -21.1,-4.5 -22.2,-5.6 -22.2,-6.9 -20.1,-9 -20.1,-10.8 -17.9,-13 -17.9,-13.6 -21.1,-13.6
VBATPROTECTED on Bottom Layer "Bottom VBATPROTECTED 2" (solid, remove dead copper, pour order 20): 9.375,-12.225 10.125,-12.975 10.675,-12.975 11.325,-12.325 13.45,-12.325 13.875,-11.9 13.875,-10.55 13.4,-10.075 10.375,-10.075 9.375,-11.075

## Keep-outs
Top Layer:
  circle w0.1: c-11,0 r2
  circle w0.1: c11,0 r2
  lines w0.01: -22.175,-11.544 cw(c0,0) -1.09,24.976 -0.985,24.826 ccw(c0,25) 0.985,24.826 1.09,24.976 cw(c0,0) 22.175,-11.544 21.993,-11.56 ccw(c21.651,-12.5) 21.008,-13.266 21.085,-13.432 cw(c0,0) -21.085,-13.432 -21.008,-13.266 ccw(c-21.651,-12.5) -21.993,-11.56 -22.175,-11.544
  lines w0.1: -11.7,18.7 -10.4,17.4 -9.744,17.4 -8.644,18.5 -8.503,18.5 -7.743,17.74 -7.301,17.299 -4.827,19.773 -8.527,23.473 -11.143,20.857 -10.412,20.126 -11.7,18.838 -11.7,18.7
  lines w0.15: 1.5,-19.5 2.7,-21.6 2.7,-25
Bottom Layer:
  lines w0.01: -22.175,-11.544 cw(c0,0) -1.09,24.976 -0.985,24.826 ccw(c0,25) 0.985,24.826 1.09,24.976 cw(c0,0) 22.175,-11.544 21.993,-11.56 ccw(c21.651,-12.5) 21.008,-13.266 21.085,-13.432 cw(c0,0) -21.085,-13.432 -21.008,-13.266 ccw(c-21.651,-12.5) -21.993,-11.56 -22.175,-11.544
  lines w0.1: -8.503,18.5 -8.644,18.5 -9.744,17.4 -10.4,17.4 -11.7,18.7 -11.7,18.838 -10.412,20.126 -11.143,20.857 -8.527,23.473 -4.827,19.773 -7.301,17.299 -7.743,17.74
  lines w0.15: 1.5,-19.5 2.7,-21.6 2.7,-25 ; 1.519,-18.135 12.2,-12.3 14.275,-12.3

## Silkscreen, mask and mechanical layers (free items; w line width, h text height)
Top Overlay:
  lines w0.15: -21.55,2.5 -19.5,3.8 ; -20.475,-2.925 -19.8,-3.675 ; -18.575,6.05 -17.725,5.225 ; -15.6,3.8 -14.05,4.775 ; -13.182,-17.943 -12.5,-17.2 ; -11.684,-3.113 -11.1,-2.675 ; -11,-18.675 -10.8,-16.85 ; -9.5,-19.95 -8.8,-18.175 ; -5.209,23.45 -4.8,23.825 ; -2.275,5.25 -2.063,4.583 ; 0.1,-23.15 0.75,-22.75 ; 1.8,17.6 2.179,17.154 ; 11.35,-3.825 11.498,-5.628 11.7,-5.8 ; 13.2,-3 13.475,-2.225 ; 14.249,-7.598 14.275,-8.85 ; 16.625,6.175 17.55,7.1 ; 18.1,13.75 18.15,14.45 ; 19.375,4.775 20.175,3.825 ; 20.975,5.475 20.976,7.034
  text "+-" at -19.15,12.725 h1 r270
  text "+-" at 19.5,11.275 h1
  text "-  +" at -21.225,-7.475 h1 r30
  text "+-" at -0.675,-24.125 h1 r180
Bottom Overlay:
  lines w0.15: -18.4,10.3 -16.91,9.383 ; -15.225,4.65 -13.9,4.6 ; -14.2,7.2 -10.875,7.775 -8.2,7.65 ; -14.15,9.9 -13.6,9.4 ; -13.446,15.446 -13.15,14.95 ; -10.376,15.283 -7.908,15.906 ; -7.7,17.525 -6.088,17.883 ; -7,10.5 -6.425,9.25 ; -5.625,11.6 -4.478,10.579 ; -4.194,15.614 -3.725,16.275
  text "EPFL CHILI" at 16.825,-17.475 h1
  text "Cellulo" at 14.95,-18.975 h1
  text "Main Board" at 12.85,-20.5 h1
  text "v0.2" at 10.775,-21.925 h1
Mechanical 1:
  the board outline again, w0.1
Mechanical 31:
  lines w0.15: -22.6,-3.6 -16.5,-9.7 -16.5,-15.7 -15.2,-17 -13.8,-17 -12.8,-16 -12.8,-13.6 -13.5,-12.9 -13.5,-9.7 -14,-9.2 -14,-6 -12.3,-4.3 -12.3,-3 -14.7,-0.6 -15.6,-0.6 -16.6,-1.6 -16.6,-4.1 -17.6,-5.1 -18,-5.1 -19.9,-3.2 -19.9,5.1 -19.1,5.9 -14.8,5.9 -14.1,6.6 -14.1,8.7 -20.6,8.7 -22.6,6.7 -22.6,-3.6 ; -21.6,-14.8 -15.5,-20.9 -8.7,-20.9 -7.7,-21.9 -4.7,-21.9 -4.1,-21.3 -4.1,-18.9 -7.6,-15.4 -8.3,-15.4 -8.5,-15.6 -8.5,-16 -8.9,-16.4 -10.5,-16.4 -20.3,-6.6 -20.5,-6.6 -21.6,-7.7 -21.6,-14.8 ; -15.775,1.575 -14.613,0.412 -13.65,1.375 -13.65,4.35 -14.675,4.35 -15.775,3.25 -15.775,1.575 ; -14.8,17 -14.8,17.2 -14.625,17.375 -4.45,17.375 -4.25,17.175 -4.25,16.65 -4.6,16.3 -14.1,16.3 -14.8,17 ; -11.3,-25 -11.3,-21.4 -11.3,-21.3 -4.9,-14.9 2,-14.9 9.5,-10.5 9.5,-6.5 9.5,-6.3 23.3,7.5 26.4,7.5 22.9,4 22.9,-11.1 21.9,-12.1 13,-12.1 1.4,-18.8 1.4,-19.1 4.1,-21.8 4.1,-25 -11.3,-25
Mechanical 32:
  lines w0.15: -23,-11.7 -23,4.4 -22.3,5.1 -21.8,5.1 -21.1,4.4 -21.1,-2.5 -21.1,-4.5 -22.2,-5.6 -22.2,-6.9 -20.1,-9 -20.1,-10.8 -17.9,-13 -17.9,-13.6 -21.1,-13.6 -23,-11.7 ; -17.7,-18.2 -17.7,-17 -15,-14.3 -13.9,-14.3 -13.4,-14.8 -13.4,-16.2 -8.4,-21.2 -6.4,-21.2 -6.4,-22.2 -5.3,-23.3 0.1,-23.3 0.1,-23 2.4,-23 2.4,-25 -10.9,-25 -17.7,-18.2 ; -15.15,1.475 -14.85,1.175 -13.75,1.175 -13.75,3.225 -14.125,3.6 -14.125,3.975 -14.45,4.3 -15.15,4.3 -15.15,1.475 ; 9.375,-12.225 9.375,-11.075 10.375,-10.075 13.4,-10.075 13.875,-10.55 13.875,-11.9 13.45,-12.325 11.325,-12.325 10.675,-12.975 10.125,-12.975 9.375,-12.225